# EAGLE board Led_Cup_Top_V3 (EAGLE 9.0.0)
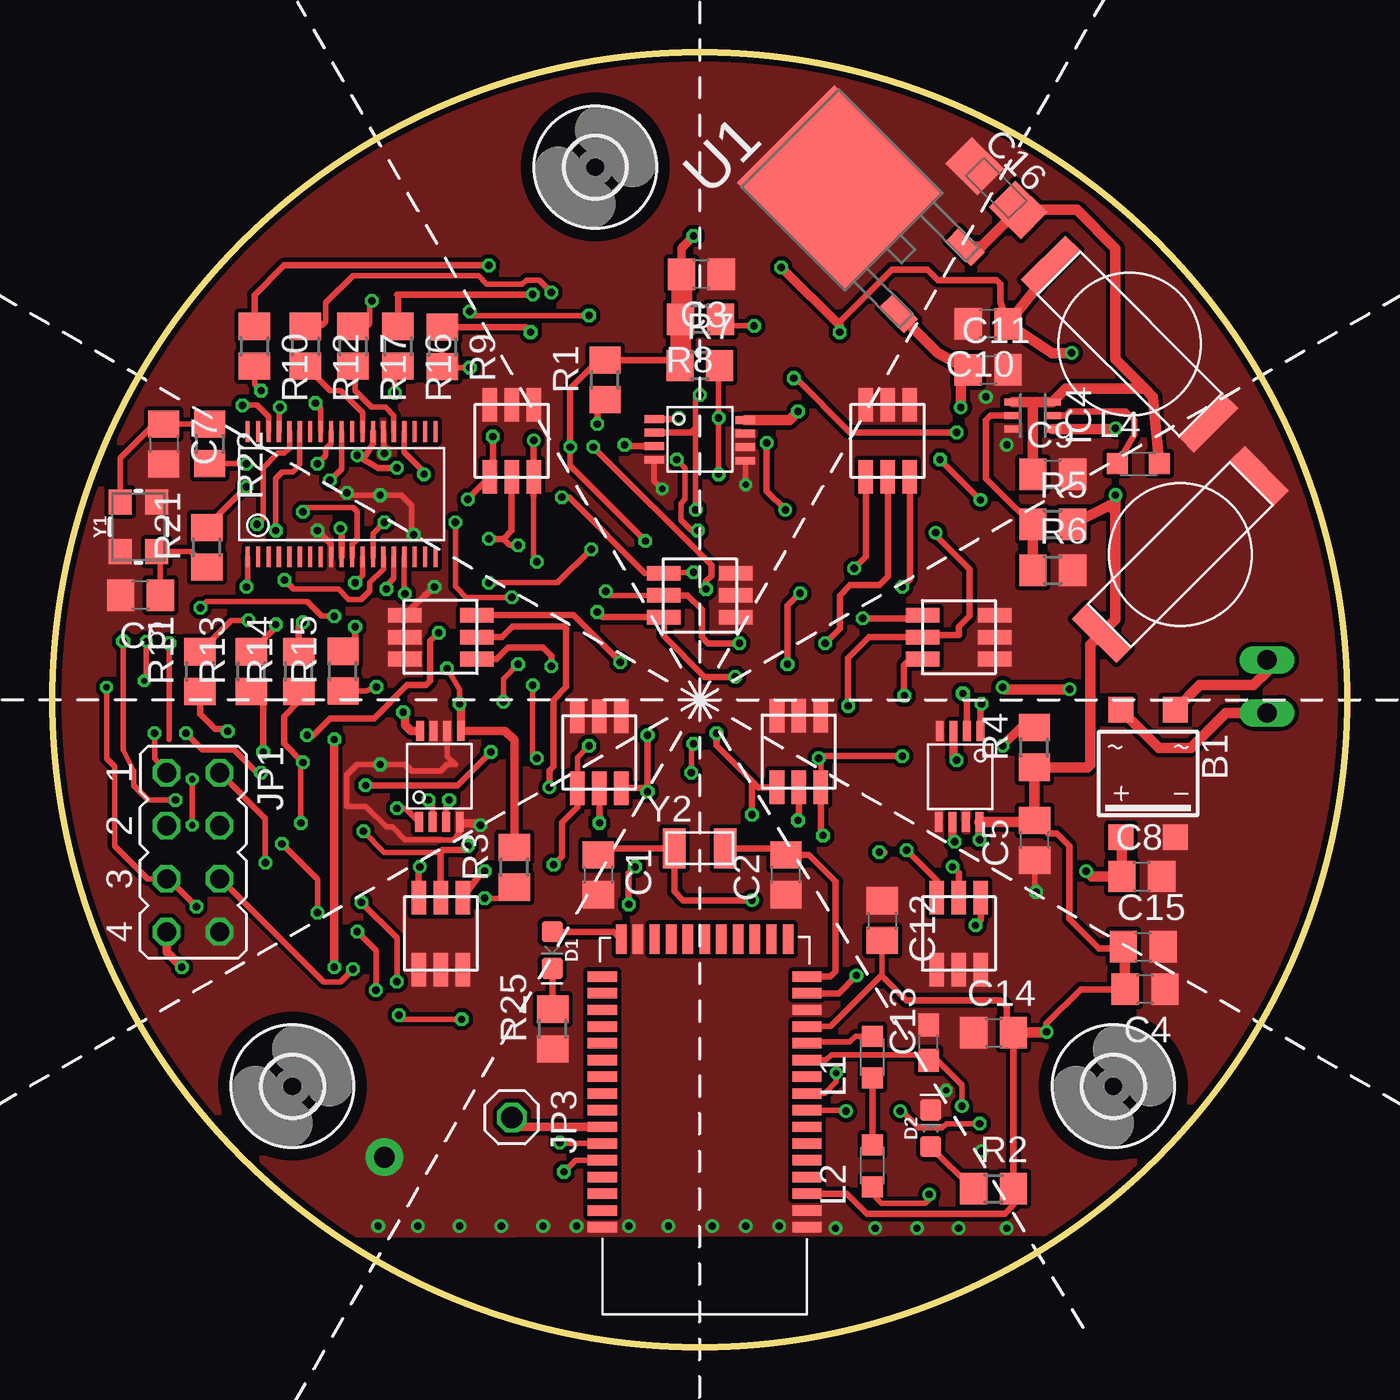
[diagram p0: board, top side]
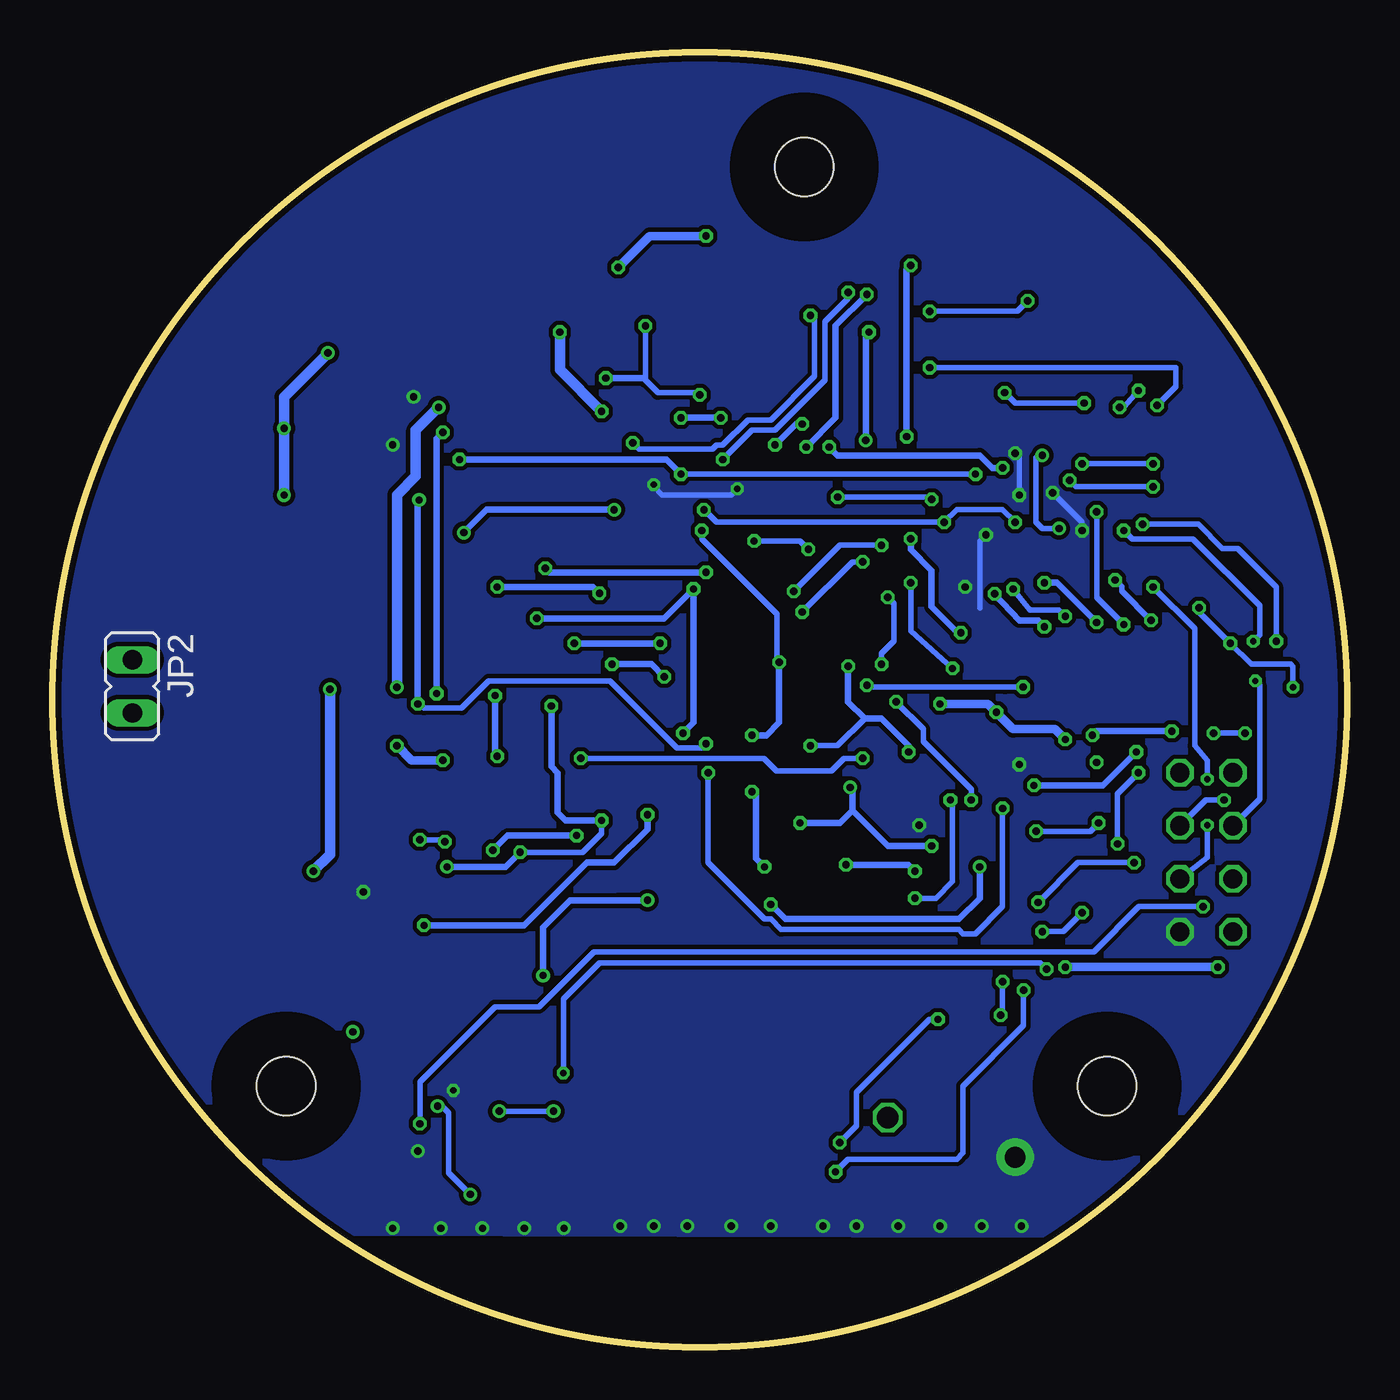
[diagram p1: board, bottom side, seen from below]

Size 62 x 62 mm. Coordinates in mm from the lower left corner, seen from the top.
Outline: circle at 31,31 radius 31
Copper layers (1*16): Top 0.035mm / dielectric 1.5mm / Bottom 0.035mm
Design rules "Bachelorarbeit": minimum track width 0.15mm, minimum drill 0.3mm, track to track 0.205mm, track to pad 0.205mm, pad to pad 0.205mm, via to via 0.205mm, smd to smd 0mil, copper to edge 0.3mm, drill to drill 0.2mm, minimum pad ring 0.2mm, minimum via ring 0.15mm, stop-mask expansion 0.075mm, vias tented up to drill 0mil, thermal gap 0.2mm
Net classes: 0 default: clearance 0.205 mm
tRestrict: area 13.4,-0.8 to 48.8,5.2
bRestrict: area 13.4,-0.9 to 48.8,5.2

## Footprints (pad centres in the part's own frame; a part is rotated, then mirrored left to right if it is on the bottom)
SOIC-4 = smd 1.2 x 1.2: + 1.3,3.05; - -1.3,3.05; ~1 -1.3,-3.05; ~2 1.3,-3.05
C0805 = smd 1.3 x 1.5: 1 -0.95,0; 2 0.95,0
C0603 = smd 1.1 x 1: 1 -0.85,0; 2 0.85,0
A/3216-18W = smd 2.15 x 1.8: + 1.475,0; - -1.475,0
LED-0603 = smd 1 x 1: A -0.877,0; C 0.877,0
LM75MINI = smd 0.95 x 0.38: A0 2.18,0.3; A1 2.18,-0.35; A2 2.18,-1; GND -2.18,-0.95; OS -2.18,-0.3; SCL -2.18,0.35; SDA -2.18,1; VCC 2.18,0.95
SOIC65P210X95-6N = smd 0.35 x 0.8: 1 -0.653,-0.908; 2 -0.003,-0.908; 3 0.647,-0.908; 4 0.647,0.992; 5 -0.003,0.992; 6 -0.653,0.992
JP4Q = drill 0.914 octagon: 1 -3.81,-1.27; 2 -3.81,1.27; 3 -1.27,-1.27; 4 -1.27,1.27; 5 1.27,-1.27; 6 1.27,1.27; 7 3.81,-1.27; 8 3.81,1.27
JP1 = drill 0.914 long: 1 0,-1.27; 2 0,1.27
1X01 = drill 1.016 octagon: 1 0,0
L2012C = smd 1 x 1: 1 -1,0; 2 1,0
R0805 = smd 1.3 x 1.5: 1 -0.95,0; 2 0.95,0
TO228P972X240-3N = smd 0.94 x 1.702: 1 -2.261,-6.096; 3 2.261,-6.096 | smd 6.604 x 7.315: 2 0,0.152
CREEPLCC6 = smd 1.6 x 0.7: B -1.719,1.05; G -1.719,0; GND_B 1.719,1.05; GND_G 1.719,0; GND_R 1.719,-1.05; R -1.719,-1.05
XMC1400_38P = smd 1 x 0.2: P$1 -3,4.5; P$2 -3,4; P$3 -3,3.5; P$4 -3,3; P$5 -3,2.5; P$6 -3,2; P$7 -3,1.5; P$8 -3,1; P$9 -3,0.5; P$10 -3,0; P$11 -3,-0.5; P$12 -3,-1; P$13 -3,-1.5; P$14 -3,-2; P$15 -3,-2.5; P$16 -3,-3; P$17 -3,-3.5; P$18 -3,-4; P$19 -3,-4.5; P$20 3,-4.5; P$21 3,-4; P$22 3,-3.5; P$23 3,-3; P$24 3,-2.5; P$25 3,-2; P$26 3,-1.5; P$27 3,-1; P$28 3,-0.5; P$29 3,0; P$30 3,0.5; P$31 3,1; P$32 3,1.5; P$33 3,2; P$34 3,2.5; P$35 3,3; P$36 3,3.5; P$37 3,4; P$38 3,4.5
GOLDCAP = smd 3 x 1: P$1 0,-5.35; P$2 0,5.35
RBT07 = smd 1.4 x 0.5: 1 -0.649,13.085; 2 -0.649,12.285; 3 -0.649,11.485; 4 -0.649,10.685; 5 -0.649,9.885; 6 -0.649,9.085; 7 -0.649,8.285; 8 -0.649,7.485; 9 -0.649,6.685; 10 -0.649,5.885; 11 -0.649,5.085; 12 -0.649,4.285; 13 -0.649,3.485; 14 -0.649,2.685; 15 -0.649,1.885; 16 -0.649,1.085; 28 9.151,1.085; 29 9.151,1.885; 30 9.151,2.685; 31 9.151,3.485; 32 9.151,4.285; 33 9.151,5.085; 34 9.151,5.885; 35 9.151,6.685; 36 9.151,7.485; 37 9.151,8.285; 38 9.151,9.085; 39 9.151,9.885; 40 9.151,10.685; 41 9.151,11.485; 42 9.151,12.285; 43 9.151,13.085 | smd 0.5 x 1.4: 17 0.251,-0.7; 18 1.051,-0.7; 19 1.851,-0.7; 20 2.651,-0.7; 21 3.451,-0.7; 22 4.251,-0.7; 23 5.051,-0.7; 24 5.851,-0.7; 25 6.651,-0.7; 26 7.451,-0.7; 27 8.251,-0.7
2,8 = hole 2.8: 0,0
CRYSTAL-SMD-3.2X2.5MM = smd 1.2 x 1.1: 1 -1.175,-0.875; 2 1.175,-0.875; 3 1.175,0.875; 4 -1.175,0.875
XTAL320X150X75 = smd 1.092 x 1.905: 1 -1.219,0; 2 1.219,0

## Placement (x,y rotation side)
B1  MB4S  [SOIC-4]  52.46,27.47 180 top
C1  7pF  [C0805]  26.14,22.62 270 top
C2  7pF  [C0805]  35.13,22.62 90 top
C3  100nF  [C0805]  31.07,51.37 180 top
C4  100nF  [C0805]  52.31,17.14 180 top
C5  100nF  [C0805]  47.04,24.27 90 top
C6  4pF  [C0805]  4.23,36.01 180 top
C7  4pF  [C0805]  5.34,43.24 270 top
C8  ?uF  [C0805]  52.16,22.54 0 top
C9  ?uF  [C0805]  47.9,41.8 0 top
C10  ?uF  [C0805]  44.8,49 180 top
C11  0.1uF  [C0805]  44.8,46.8 0 top
C12  0.1uF  [C0805]  39.73,20.43 270 top
C13  1uF  [C0603]  41.96,14.59 90 top
C14  10uF  [C0805]  45.06,15.07 0 top
C15  10uF  [C0805]  52.23,19.18 0 top
C16  [A/3216-18W]  45.2,55.5 315 top
D1  RED  [LED-0603]  23.93,19.02 270 top
D2  BLUE  [LED-0603]  42.06,10.49 90 top
IC1  LM75Mini_TempS N  [LM75MINI]  31,43.44 0 top
IC2  LM75Mini_TempSW  [LM75MINI]  18.56,27.33 90 top
IC3  LM75Mini_TempSE  [LM75MINI]  43.44,27.33 270 top
IC4  TPS61220DCKT  [SOIC65P210X95-6N]  46.9,44.6 270 top
JP1  [JP4Q]  6.74,23.7 270 top
JP2  [JP1]  58.16,31.64 180 bottom
JP3  [1X01]  22,11 270 top
L1  [L2012C]  39.26,13.89 90 top
L2  [L2012C]  39.26,8.69 90 top
L4  [L2012C]  52,42.3 0 top
R1  4.7k  [R0805]  26.46,46.31 90 top
R2  1k  [R0805]  45.06,7.59 0 top
R3  4.7k  [R0805]  22.13,22.98 90 top
R4  4.7k  [R0805]  47.02,28.72 90 top
R5  1M  [R0805]  47.9,39.4 0 top
R6  178k  [R0805]  47.9,37.2 0 top
R7  10k  [R0805]  31,47 0 top
R8  10k  [R0805]  31.04,49.21 180 top
R9  12  [R0805]  18.67,47.89 270 top
R10  12  [R0805]  9.68,47.92 270 top
R11  12  [R0805]  7.08,32.35 90 top
R12  12  [R0805]  12.12,47.92 270 top
R13  12  [R0805]  9.54,32.35 90 top
R14  12  [R0805]  11.81,32.35 90 top
R15  12  [R0805]  13.93,32.38 90 top
R16  12  [R0805]  16.55,47.92 270 top
R17  12  [R0805]  14.39,47.92 270 top
R21  0  [R0805]  7.4,38.3 90 top
R22  510  [R0805]  7.54,43.25 270 top
R25  4.7k  [R0805]  23.96,15.24 90 top
U1  LF33CDT  [TO228P972X240-3N]  37.8,55.4 45 top
U$1  CREEPLCC6  [CREEPLCC6]  31,36 0 top
U$2  CREEPLCC6  [CREEPLCC6]  40,43.4 90 top
U$3  CREEPLCC6  [CREEPLCC6]  22,43.4 90 top
U$4  CREEPLCC6  [CREEPLCC6]  26.19,28.49 90 top
U$5  CREEPLCC6  [CREEPLCC6]  18.6,34 180 top
U$6  CREEPLCC6  [CREEPLCC6]  18.6,19.8 270 top
U$7  CREEPLCC6  [CREEPLCC6]  43.4,34 0 top
U$8  CREEPLCC6  [CREEPLCC6]  35.75,28.52 90 top
U$9  CREEPLCC6  [CREEPLCC6]  43.4,19.8 270 top
U$10  XMC1400_38P  [XMC1400_38P]  13.86,40.84 90 top
U$11  GOLDCAP  [GOLDCAP]  51.58,48.03 45 top
U$12  BLE NANO 2  [RBT07]  35.48,18.84 180 top
U$13  GOLDCAP  [GOLDCAP]  54.01,37.95 135 top
U$15  [2,8]  11.5,12.5 0 top
U$16  [2,8]  50.8,12.5 0 top
U$17  [2,8]  26,56.5 0 top
Y1  CRYSTAL-GROUNDEDSMD-3.2X2.5  [CRYSTAL-SMD-3.2X2.5MM]  4.13,39.28 90 top
Y2  9HT10-32.768KAZF-T  [XTAL320X150X75]  31,23.89 0 top

## Library data of the parts
B1 = rectifier
C1-C16 = rcl; SPICEPREFIX: C
D1 = SparkFun-LED; PROD_ID: DIO-00819
D2 = SparkFun-LED; PROD_ID: DIO-08575
IC1-IC3 U$1-U$11 U$13 = 1_MynewBib
IC4 = TPS61220DCKT; AVAILABILITY: Good; DESCRIPTION: Low Input Voltage, 0.7V Boost Converter with 5.5A Quiescent Current 6-SC70 -40 to 85; MF: Texas Instruments; MP: TPS61220DCKT; PACKAGE: SC-70 Texas Instruments; PRICE: 0.84 USD
JP1 JP2 = jumper
JP3 = pinhead
L1 L2 L4 = rcl; SPICEPREFIX: L
R1-R17 R21 R22 R25 = rcl; SPICEPREFIX: R
U1 = LF33CDT; AVAILABILITY: Unavailable; DESCRIPTION: Voltage stabiliser; LDO, fixed; 3.3V; 1A; TO252AA; SMD; MF: STMicroelectronics; MP: LF33CDT; PACKAGE: TO-252 STMicroelectronics; PRICE: 0.66 USD
U$12 = 1RedBeard
U$15-U$17 = holes
Y1 = SparkFun-Clocks
Y2 = 9HT10-32.768KAZF-T

## Nets
BLAU_N: R10.1 U$1.B U$2.B U$3.B
BLAU_SO: R16.1 U$7.B U$8.B U$9.B
BLAU_SW: R13.1 U$4.B U$5.B U$6.B
GND: B1.- C1.2 C2.1 C3.1 C4.1 C5.1 C6.2 C7.2 C8.2 C9.2 C10.2 C11.2 C12.1 C13.2 C14.1 C15.2 C16.- D2.C IC1.A0 IC1.A1 IC1.A2 IC1.GND IC2.A0 IC2.A1 IC2.GND IC3.A0 IC3.A2 IC3.GND IC4.3 JP1.8 R6.2 R25.1 U1.2 U$1.GND_B U$1.GND_G U$1.GND_R U$2.GND_B U$2.GND_G U$2.GND_R U$3.GND_B U$3.GND_G U$3.GND_R U$4.GND_B U$4.GND_G U$4.GND_R U$5.GND_B U$5.GND_G U$5.GND_R U$6.GND_B U$6.GND_G U$6.GND_R U$7.GND_B U$7.GND_G U$7.GND_R U$8.GND_B U$8.GND_G U$8.GND_R U$9.GND_B U$9.GND_G U$9.GND_R U$10.P$9 U$10.P$25 U$11.P$1 U$12.1 U$12.2 U$12.14 U$12.26 U$12.43 U$13.P$1 Y1.2 Y1.4
GRüN_N: R11.1 U$1.G U$2.G U$3.G
GRüN_SO: R17.1 U$7.G U$8.G U$9.G
GRüN_SW: R14.1 U$4.G U$5.G U$6.G
N$1: IC1.OS R1.1
N$2: IC3.OS R4.2
N$3: IC2.OS R3.1
N$4: C9.1 C16.+ IC4.1 IC4.6 L4.2 U1.3
N$5: IC4.5 L4.1
N$6: IC4.2 R5.1 R6.1
N$28: B1.~2 JP2.2
N$29: C7.1 R22.1 Y1.3
N$30: C6.1 R21.1 Y1.1
N$34: D2.A R2.1
N$35: B1.~1 JP2.1
N$36: L1.2 U$12.12
N$38: L1.1 L2.2
N$39: C13.1 L2.1 U$12.11
N$70: C1.1 U$12.15 Y2.1
N$71: C2.2 U$12.16 Y2.2
N$74: D1.C R25.2
N$75: D1.A U$12.27
P0.10: R21.2 U$10.P$29
P0.11: R22.2 U$10.P$30
P_BLAU_N: R10.2 U$10.P$35
P_BLAU_SO: R16.2 U$10.P$31
P_BLAU_SW: R13.2 U$10.P$11
P_GRüN_N: R11.2 U$10.P$14
P_GRüN_SO: R17.2 U$10.P$24
P_GRüN_SW: R14.2 U$10.P$12
P_ROT_N: R9.2 U$10.P$36
P_ROT_SO: R15.2 U$10.P$16
P_ROT_SW: R12.2 U$10.P$27
RESET: JP3.1 U$12.37
ROT_N: R9.1 U$1.R U$2.R U$3.R
ROT_SO: R15.1 U$7.R U$8.R U$9.R
ROT_SW: R12.1 U$4.R U$5.R U$6.R
SCL: IC1.SCL IC2.SCL IC3.SCL R8.1 U$10.P$13
SCLK: JP1.2 U$12.38
SDA: IC1.SDA IC2.SDA IC3.SDA R7.2 U$10.P$23
SDIO: JP1.1 U$12.39
SWCLK: JP1.4 U$10.P$34
SWD: JP1.3 U$10.P$33
UART_RX: JP1.6 U$10.P$1 U$12.9
UART_TX: JP1.5 U$10.P$15 U$12.8
VCC: C3.2 C4.2 C5.2 C10.1 C12.2 C14.2 C15.1 IC1.VCC IC2.A2 IC2.VCC IC3.A1 IC3.VCC IC4.4 JP1.7 R1.2 R2.2 R3.2 R4.1 R5.2 R7.1 R8.2 U$10.P$10 U$10.P$26 U$11.P$2 U$12.3 U$12.13 U$13.P$2
VCC_DC: B1.+ C8.1 C11.1 U1.1

## Tracks (layer width: path | path; a pad name or v marks a point on that pad's centre or on a via)
BLAU_N  (via drill 0.35)
  Top 0.254: v24.4,40.7 24.73,40.7 28.38,37.05 U$1.B 29.33,37.1 v30.7,37.1
  Top 0.305: v20.9,51.8 11.1,51.8 9.68,50.38 R10.1 | v38.4,37.3 38.95,37.85 U$2.B | v19.9,40.6 19.9,40.63 U$3.B 21.1,41.83 v21.1,43.6
  Bottom 0.254: v24.4,40.7 20,40.7 v19.9,40.6
  Bottom 0.305: v21.1,43.6 21.1,51.6 v20.9,51.8 | v38.4,37.3 38.2,37.1 v30.7,37.1
BLAU_SO  (via drill 0.35)
  Top 0.305: R16.1 16.55,50.34 16.5,50.4 v23,50.4 | v38.8,34.9 41.53,34.9 U$7.B | v31.8,29.4 31.8,28.8 33.5,27.1 | v44.2,20.2 44.45,20.45 U$9.B | v31.3,36.3 31.3,36.68 31.55,36.93 31.55,37.45 v25.9,43.1 | 33.5,27.1 v33.5,25.5 | U$8.B 33.8,26.8 33.5,27.1
  Bottom 0.305: v23,50.4 24.5,48.9 24.5,44.5 v25.9,43.1 | v38.8,34.9 32.7,34.9 v31.3,36.3 31.3,29.9 v31.8,29.4 | v44.2,20.2 39.4,20.2 36.4,23.2 35.1,23.2 33.5,24.8 v33.5,25.5
BLAU_SW  (via drill 0.35)
  Top 0.254: U$4.B 25.14,28.24 v25.7,28.8
  Top 0.305: R13.1 10.1,30.84 v10.1,28.5 | v15,26.9 19.4,26.9 v21,28.5 | U$6.B 20.32,22.42 v20.7,22.8 | v24,23.1 24.4,23.5 24.4,25.12 25.14,25.87 U$4.B | U$5.B 21.27,32.95 21.82,33.5 23.5,33.5 23.9,33.1 v23.9,32.6
  Bottom 0.254: v25.7,28.8 24.4,28.8 23.1,30.1
  Bottom 0.305: v23.9,32.6 23.9,30.9 23.1,30.1 22.3,30.1 21,28.8 v21,28.5 | v10.1,28.5 11.7,26.9 v15,26.9 | v20.7,22.8 21,23.1 v24,23.1
GND  (via drill 0.3, 0.35, 1)
  Top 0.254: U$10.P$9 13.36,38.45 v12.7,39.1 | U$10.P$25 15.86,43.05 v15.9,42.8 | IC2.GND 20.35,25.15 v20.5,25 19.66,25 IC2.GND | C5.1 47.04,21.86 v47.1,21.8 | IC2.A1 18.91,28.29 19.3,27.9 18.9,27.9 18.6,27.6 17.2,27.6 16.9,27.9 v15.7,27.9 14.6,27.9 14.1,27.4 14.1,25.9 15,25.9 16,24.9 16.3,24.9 16.9,24.3 19.2,24.3 19.51,24.61 IC2.GND | v14.1,40.9 14.2,40.8 v15.7,40.8 16.7,40.8 17.2,40.3 17.2,39 v17.3,38.9 | IC1.GND 28.82,41.48 v29.2,41.1 | v33.2,41.3 33.2,42.42 IC1.A2
  Top 0.305: v18.3,36.4 17.8,35.97 U$5.GND_R
  Bottom 0.254: v15.9,42.8 15.7,42.6 v15.7,40.8 | v14.1,40.9 12.7,39.5 v12.7,39.1 | v17.3,38.9 17.6,38.6 17.6,35.4 | v29.2,41.1 29.5,40.8 32.8,40.8 33.2,41.2 v33.2,41.3
  other vias: 15.6,5.8 17.5,5.8 19.5,5.8 21.5,5.8 23.5,5.8 25.1,5.8 27.6,5.8 29.5,5.8 31.6,5.8 34.8,5.8 33.2,5.8 37.5,5.7 39.4,5.7 41.4,5.7 43.4,5.7 45.7,5.7 42.8,12.3 15.9,9.1 45.7,43.2 44.7,45.5 44.5,9.4
  pour Top (no thermals): -7.23,0.44 -7.23,69 66.94,69 67.9,68.05 68.85,-5.2 67.58,-5.47 -6.32,-5.47
  pour Bottom (no thermals): -10.81,-7.1 -10.81,65.91 -10.55,72.23 69.9,72.23 70.44,69.32 71.48,-6.15 69.58,-8.05 -9.86,-8.05
GRüN_N  (via drill 0.35)
  Top 0.254: v26.5,36.2 26.7,36 U$1.G | v22.3,38.4 21.9,38.4 21.6,38.7
  Top 0.305: R11.1 7.08,30.32 7.8,29.6 8.3,29.6 v8.4,29.5 | v12.2,29.3 12.5,29.3 13.3,30.1 15.4,30.1 17,31.7 17.9,31.7 18.1,31.9 18.1,33.8 v18.5,34.2 | v20.9,38.7 21.6,38.7 22,39.1 U$3.G | v37,33.7 37.7,34.4 37.7,36 38.2,36.5 39.6,36.5 40,36.9 U$2.G | v32.9,33.7 31.4,33.7 31.1,34 31.1,35.32 30.42,36 U$1.G
  Bottom 0.254: v26.5,36.2 24.3,38.4 v22.3,38.4
  Bottom 0.305: v8.4,29.5 12,29.5 v12.2,29.3 | v32.9,33.7 v37,33.7 | v20.9,38.7 20.9,38.19 19.9,37.19 19.9,35.45 18.65,34.2 v18.5,34.2
GRüN_SO  (via drill 0.35)
  Top 0.254: v25.7,49.4 20.2,49.4 v20,49.6 | v15.3,50.1 15.2,50 15.2,49 15.1,48.9 14.4,48.9 R17.1 | 41.79,34 40.78,34 | U$9.G 43.4,21.99
  Top 0.305: v38.1,30.7 38.1,33 39.1,34 40.78,34 U$7.G | 35.7,27.4 35.75,27.35 U$8.G 35.75,25.27 v35.7,25.22 | 43.4,21.99 43.4,22.7 v43.1,23 | v34.2,43.3 34.2,41 v35.1,40.1 | v42.3,39 42.3,38.86 43.9,37.26 43.9,35 43.4,34.5 43.4,34.1 41.89,34.1 41.79,34
  Top 0.406: 39.8,23.7 v39.6,23.7
  Bottom 0.254: v35.7,25.22 35.7,24.6 36.6,23.7 v39.6,23.7 | v34.2,43.3 33.9,43 30.4,43 30.2,43.2 29.9,43.2 28.7,44.4 27.6,44.4 25.5,46.5 25.5,49.3 v25.7,49.4 | v20,49.6 15.8,49.6 v15.3,50.1
  Bottom 0.305: v38.1,30.7 38.1,27.8 37.8,27.5 37.8,25.6 37.42,25.22 v35.7,25.22 | v43.1,23 40.3,23 v39.6,23.7 | v35.1,40.1 41.2,40.1 v42.3,39
GRüN_SW  (via drill 0.35)
  Top 0.254: 18.6,23.7 15.9,23.7 v14.9,24.7 | v11.9,25.1 11.9,27.9 v12,28
  Top 0.305: 21.54,34 21.22,34 | R14.1 11.81,30.91 11.1,30.2 11.1,28.9 v12,28 | v19.9,24 19.7,23.8 18.7,23.8 18.6,23.7 U$6.G | v23.8,26.8 23.8,27.6 24,27.8 24,31 24.6,31.6 24.6,34.4 24.5,34.5 22.04,34.5 21.54,34 | U$4.G v26.19,25.11 v26.2,25.1 | U$5.G 21.54,34
  Bottom 0.254: v14.9,24.7 12.3,24.7 v11.9,25.1
  Bottom 0.305: 23.7,25.7 23.7,26.7 v23.8,26.8 | 21.4,24 v19.9,24 22,24 23.7,25.7 | v26.2,25.1 24.3,25.1 23.7,25.7
N$1  (via drill 0.35)
  Top 0.305: IC1.OS 27.46,43.14 v27.4,43.2 | v26.1,44.2 26.1,45 R1.1
  Bottom 0.305: v27.4,43.2 26.4,44.2 v26.1,44.2
N$2  (via drill 0.35)
  Top 0.406: IC3.OS 43.14,28.26 v43.3,28.1 | v45.5,28.8 46.37,29.67 R4.2
  Bottom 0.406: v43.3,28.1 44.8,28.1 v45.5,28.8
N$3  (via drill 0.35)
  Top 0.254: IC2.OS 18.86,26.06 v19,26.2 | R3.1 21.6,21.5 v20.7,21.5
  Bottom 0.254: v20.7,21.5 19.7,21.5 18.9,22.3 18.9,26.1 v19,26.2
N$4
  Top 0.508: C9.1 46.95,45.15 | IC4.1 46.85,45.25 46.95,45.15 | 46.95,45.15 47.05,45.25 IC4.6 48.54,45.9 52.3,45.9 | L4.2 52.7,45.5 52.3,45.9 | U1.3 44.47,52.69 C16.+ 49.04,54.46 50.9,52.6 50.9,47.3 52.3,45.9
N$5
  Top 0.305: L4.1 51.8,43.7 51.8,44.4 51.4,44.8 48.7,44.8 48.5,44.6 IC4.5
N$6
  Top 0.305: IC4.2 44.9,44.6 44.7,44.4 44.7,41.6 46,40.3 R5.1
  Top 0.508: R6.1 R5.1
N$28
  Top 0.508: JP2.2 56.17,30.37 54.5,28.7 52.98,28.7 B1.~2 51.4,30.28
N$29
  Top 0.254: Y1.3 3.25,42.57 4.88,44.19 C7.1 7.53,44.19 R22.1
N$30
  Top 0.254: C6.1 5.18,37.91 5.16,37.93 Y1.1 6.64,38.11 R21.1
N$34
  Top 0.305: R2.1 42.06,9.54 D2.A
N$35
  Top 0.508: B1.~1 54.94,31.7 57.5,31.7 58.16,32.36 JP2.1
N$36
  Top 0.254: L1.2 38.45,14.89 38.17,14.61 36.2,14.61 U$12.12
N$38
  Top 0.305: L1.1 L2.2
N$39  (via drill 0.35)
  Top 0.254: U$12.11 37.05,13.75 37.3,14 41.6,14 C13.1 42.37,13.74 43.55,12.56 v43.55,11.54 | L2.1 39.26,7.34 39.7,6.9 41.77,6.9 42.06,7.19
  Top 0.305: 42.06,7.19 v41.99,7.32
  Bottom 0.254: v43.55,11.54 43.34,11.54 43.02,11.22 43.02,8.35 v41.99,7.32
N$70  (via drill 0.35)
  Top 0.305: C1.1 26.46,23.89 Y2.1 29.78,21.82 30.2,21.4 v33.5,21.4 | v38.5,17.8 37.65,16.95 U$12.15
  Bottom 0.305: 34.9,21.4 v33.5,21.4 37.2,21.4 38.5,20.1 v38.5,17.8
N$71
  Top 0.254: C2.2 36.23,23.57 37.5,22.3
  Top 0.305: U$12.16 37.25,17.75 37.5,18 37.5,22.3 | 36.2,23.57 C2.2 34.81,23.89 Y2.2
N$74
  Top 0.305: D1.C 23.96,18.11 R25.2
N$75
  Top 0.305: D1.A 26.88,19.89 U$12.27
P0.10  (via drill 0.35)
  Top 0.254: U$10.P$29 13.86,42.05 v13.3,41.5 | v9.3,41.2 7.4,39.3 R21.2
  Bottom 0.254: v13.3,41.5 13,41.2 v9.3,41.2
P0.11  (via drill 0.35)
  Top 0.254: R22.2 v9.3,42.3 | v12.7,42.3 13.1,42.7 13.1,43 13.36,43.26 U$10.P$30
  Bottom 0.254: v9.3,42.3 v12.7,42.3
P_BLAU_N  (via drill 0.35)
  Top 0.254: R10.2 9.68,46.12 v10,45.8 | U$10.P$35 10.86,44.95 v10.9,45
  Bottom 0.254: v10,45.8 10.7,45 v10.9,45
P_BLAU_SO  (via drill 0.35)
  Top 0.254: R16.2 16.4,46.82 v16.4,45.7 | v12.6,45.2 12.86,44.95 U$10.P$31
  Bottom 0.254: v16.4,45.7 15.9,45.2 v12.6,45.2
P_BLAU_SW  (via drill 0.35)
  Top 0.254: R13.2 10.7,34.46 v10.7,34.6 | v12,40 12.2,40.2 14.4,40.2 14.6,40 14.6,38.7 14.36,38.45 U$10.P$11
  Bottom 0.254: v10.7,34.6 12,35.9 v12,40
P_GRüN_N  (via drill 0.35)
  Top 0.254: R11.2 8.58,34.8 v9.4,34.8 | U$10.P$14 15.86,37.26 15.2,36.6 15.2,36.2 14.8,35.8 14.2,35.8 13.7,36.3 11.55,36.3 v11.12,36.73
  Bottom 0.254: v9.4,34.8 10.8,36.2 10.8,36.41 v11.12,36.73
P_GRüN_SO
  Top 0.254: R17.2 14.5,46.87 14.5,45.8 15.3,45 15.96,45 16.36,44.6 U$10.P$24
P_GRüN_SW  (via drill 0.35)
  Top 0.254: v14.5,36.6 14.86,36.95 U$10.P$12
  Top 0.305: R14.2 11.81,34.51 v12,34.7
  Bottom 0.305: v12,34.7 13.9,36.6 v14.5,36.6
P_ROT_N  (via drill 0.35)
  Top 0.254: U$10.P$36 10.36,44.55 9.8,45.1 v9.1,45.1 | 18.67,47.63 R9.2 18.7,46.9 v20,46.9
  Bottom 0.254: v9.1,45.1 8.2,46 8.2,46.9 v20,46.9
P_ROT_SO  (via drill 0.35)
  Top 0.254: v16.89,36.07 16.86,36.1 U$10.P$16
  Top 0.305: R15.2 14.5,33.9 v14.5,34.5
  Bottom 0.305: v14.5,34.5 14.8,34.8 15.7,34.8 v16.89,36.07
P_ROT_SW
  Top 0.254: R12.2 13.3,45.8 13.8,45.8 14.86,44.74 U$10.P$27
RESET
  Top 0.305: 22.7,10.55 22.45,10.55
  Top 0.406: JP3.1 22.45,10.55 22.7,10.55 22.9,10.55 U$12.37
ROT_N  (via drill 0.35)
  Top 0.254: 26.35,34.95 28.38,34.95 | v23.2,37.6 23.05,37.75 23.05,40.78
  Top 0.305: 23.05,40.78 U$3.R v23.05,43.42 | v22.9,48.6 22.66,48.84 R9.1 | v40.7,36.4 41.05,36.75 U$2.R | v35.8,36.1 35.2,35.5 v35.2,32.7 | v32.7,32.1 31.23,32.1 29.28,34.05 U$1.R 26.35,34.95 v26.1,35.2
  Bottom 0.254: v26.1,35.2 23.7,37.6 v23.2,37.6
  Bottom 0.305: v22.9,48.6 23.05,48.45 v23.05,43.42 | v40.7,36.4 36.1,36.4 v35.8,36.1 | v35.2,32.7 33.3,32.7 v32.7,32.1
ROT_SO  (via drill 0.35)
  Top 0.254: v23,31.7 23,28.4 v23.2,28.2 | v36.7,28.2 36.8,28.1 36.8,26.99 36.8,26.86 | v40.9,23.8 42.28,22.42 | R15.1 15,31.43 v15.52,31.61
  Top 0.305: v40.8,31.2 40.78,31.22 40.78,32.67 41.06,32.95 U$7.R | v40.7,28.3 36.8,28.3 v36.7,28.2 | 36.8,26.86 U$8.R 36.8,24.6 v36.9,24.5 | U$9.R 42.35,22.35 v40.9,23.8 | 36.9,26.88 36.8,26.99
  Bottom 0.254: v36.7,28.2 27.93,28.2 27.34,27.6 24.7,27.6 24.1,28.2 v23.2,28.2 | v15.52,31.61 16.39,31.6 22.9,31.6 v23,31.7
  Bottom 0.305: v40.8,31.2 40.8,28.4 v40.7,28.3 | v40.9,23.8 40.2,24.5 v36.9,24.5
ROT_SW  (via drill 0.35)
  Top 0.254: v23.9,50.5 23.3,51.1 22.7,51.1 22.5,50.9 20.8,50.9 20.4,51.3 14.4,51.3 13.1,50 13.1,49.1 12.9,48.9 12.2,48.9 R12.1 | v29.9,42.5 30.3,42.1 30.3,40.6 30.1,40.4 30.1,39.6 30.6,39.1 v30.9,39.1
  Top 0.305: v27.2,32.8 24.95,35.05 U$5.R | v27.6,21.2 27.6,22.7 v27.9,23 | U$6.R 17.55,23.05 v17.6,23 | U$4.R 28.33,26.77 v28.5,26.6 v28.5,29.3
  Bottom 0.254: v23.9,50.5 23.9,50.2 25,49.1 25,46.3 27.4,43.9 28.5,43.9 v29.9,42.5 | v30.9,39.1 30.9,38.7 27.3,35.1 27.3,32.9 v27.2,32.8
  Bottom 0.305: v27.2,32.8 27.2,29.9 27.8,29.3 v28.5,29.3 | v27.6,21.2 26.9,20.5 18.6,20.5 17.6,21.5 v17.6,23 | v27.9,23 28.3,23.4 28.3,26.4 v28.5,26.6
SCL  (via drill 0.35)
  Top 0.254: U$10.P$13 15.36,38.95 v15.9,39.5 | v30.8,40.1 30.8,44 30.8,45.4 v31,45.6 | v33.6,48.9 32.3,48.9 R8.1 | IC2.SCL 18.21,25.99 v18,26.2 | v19.3,39.5 19.3,36.42 19.82,35.9 v22,35.9 | v22.3,32.7 21.6,32 v21.6,30.9
  Top 0.305: IC1.SCL 29.69,43.79 | 29.69,43.79 29.7,43.8 | 29.69,43.79 30.59,43.79 30.8,44 | IC3.SCL 43.79,31.11 v43.6,31.3 | v43.3,43.8 38.2,43.8 35.6,46.4 v35.5,46.4
  Bottom 0.254: v30.8,40.1 30.2,39.5 v19.3,39.5 18.7,40.1 16.5,40.1 v15.9,39.5 | v31,45.6 31.1,45.7 33,45.7 33.6,46.3 v33.6,48.9 | v18,26.2 18,26.7 20.3,29 20.3,29.6 v21.6,30.9 | v22,35.9 21.7,35.6 21.7,33.8 22.3,33.2 v22.3,32.7
  Bottom 0.305: v43.6,31.3 43.6,43.5 v43.3,43.8 | v35.5,46.4 33.7,46.4 33.6,46.3
SCLK  (via drill 0.35)
  Top 0.254: U$12.38 24.35,9.75 v24.3,9.8 | v19.6,15.7 16.8,15.7 v16.6,15.9 | v16.5,17.5 16.5,19.6 v14.8,21.3 | v10.2,23.2 10.2,25.32 JP1.2
  Bottom 0.254: v24.3,9.8 23.5,10.6 23.5,12.2 20,15.7 v19.6,15.7 | v16.6,15.9 16.5,16 v16.5,17.5 | v14.8,21.3 12.9,23.2 v10.2,23.2
SDA  (via drill 0.35)
  Top 0.254: U$10.P$23 16.86,42.84 17.8,41.9 v17.8,41.8 | v31.9,41.8 v31.9,44.5 31.9,46.95 R7.2 | IC2.SDA 16.91,25.8 v16.5,25.8 | v30.7,28.9 30.6,28.8 v30.6,27.5 | v44.5,30.8 44.44,30.8
  Top 0.305: IC1.SDA 29.94,44.44 v30,44.5 | IC3.SDA 44.44,30.8 | v44.44,40.56 v42.5,42.5
  Bottom 0.254: v17.8,41.8 v31.9,41.8 | v44.5,30.8 44.4,30.8 44.2,30.6 42.4,30.6 41.1,31.9 35.3,31.9 32.1,28.7 30.9,28.7 v30.7,28.9 | v30.6,27.5 30.6,23.2 27.9,20.5 27.6,20.5 27.1,20 18.6,20 18.4,19.8 17.8,19.8 16.5,21.1 v16.5,25.8
  Bottom 0.305: v30,44.5 v31.9,44.5 | v42.5,42.5 32.6,42.5 v31.9,41.8 | v44.5,30.8 44.5,40.5 v44.44,40.56
SDIO  (via drill 0.35)
  Top 0.254: JP1.1 4.9,28.18 v4.9,29.4 | v6.4,29.4 7.2,28.6 8.7,28.6 9.8,27.5 v10,27.5 | v11,24.1 12.7,22.4 v12.7,20.8 | v14.6,19.9 15.5,19 v15.5,17.1 | 26.29,9 U$12.39 25.05,8.95 v24.5,8.4
  Bottom 0.254: v4.9,29.4 v6.4,29.4 | v10,27.5 11,26.5 v11,24.1 | v12.7,20.8 13.6,19.9 v14.6,19.9 | v15.5,17.1 15.5,15.4 18.4,12.5 18.4,9.3 18.7,9 23.9,9 v24.5,8.4
SWCLK  (via drill 0.35)
  Top 0.254: v9.8,39.4 10.1,39.7 10.1,42.1 10.8,42.8 11.1,42.8 11.36,43.05 U$10.P$34 | v3.4,33.8 3.4,28.6 3.9,27.6 3.9,26.9 4.6,26.2 v5.9,26.2
  Bottom 0.254: v5.9,26.2 6.78,26.2 JP1.4 | v9.8,39.4 7.14,39.4 5.97,38.24 5.24,38.24 3.4,36.4 v3.4,33.8
SWD  (via drill 0.3, 0.35)
  Top 0.254: v10.7,39.1 10.7,41.6 11,41.9 11.5,41.9 11.86,42.26 U$10.P$33 | v4.5,33.8 4.5,32 v4.4,31.9
  Bottom 0.254: v10.7,39.1 10.3,38.7 7.4,38.7 4.2,35.5 4.2,34.1 v4.5,33.8 | JP1.3 4.2,26.24 4.2,31.7 v4.4,31.9
UART_RX  (via drill 0.3, 0.35)
  Top 0.254: U$10.P$1 9.36,36.45 v9.3,36.4 9.2,36.3 | v14.4,18.1 13.8,17.5 13,17.5 8.1,22.4 JP1.6 | v6.7,25 v6.7,27.2 | U$12.9 36.98,12.15 37.53,12.7 v37.53,13.13
  Bottom 0.254: v9.3,36.4 7.3,34.4 7.3,28.8 6.7,28.1 v6.7,27.2 | JP1.6 6.7,23.44 v6.7,25 | v14.4,18.1 14.7,18.4 35.8,18.4 37.53,16.67 v37.53,13.13
UART_TX  (via drill 0.3, 0.35)
  Top 0.254: U$10.P$15 16.36,36.81 16,36.46 v16,36.3 | v13.5,35 12.9,35 12.2,35.7 7.4,35.7 v7.1,35.4 | 5.6,29.1 v5.6,33.7 | v44.4,10.7 42.8,10.7 42.6,10.5 41.5,10.5 40.7,11.3 v40.6,11.3 | v2.6,31.6 2.6,28.2 3,27.8 3,24 4.57,22.43 JP1.5 5.57,22.43 v6.9,21.1 | U$12.8 37.95,11.35 v38,11.3
  Bottom 0.254: v16,36.3 15.2,35.3 13.8,35.3 v13.5,35 | v7.1,35.4 7.1,35.2 v5.6,33.7 4.6,32.7 2.7,32.7 2.6,32.6 v2.6,31.6 | v44.4,10.7 44.4,12.7 40.8,16.3 38.7,16.3 36.06,18.94 12.14,18.94 9.97,21.1 v6.9,21.1 | v38,11.3 v40.6,11.3
VCC  (via drill 0.35)
  Top 0.254: 44.39,24.6 44.4,24.59 v44.4,24.3 | v19.5,30.8 19.5,31.5 v18.9,32.5 | v20.9,36.6 24.2,36.6 v25.8,38.2 | v28.4,38.6 24.8,42.2 v24.8,43.1 | 24.8,45.9 26.16,47.27 R1.2 | C12.2 39.73,17.83 39.7,17.8 37.25,15.35 U$12.13
  Top 0.305: U$10.P$10 13.86,39.14 v13.8,39.2 | U$10.P$26 15.36,43.26 15,42.7 v14.6,42.7 15.6,42.1 v16.5,42.1 | 24.8,45.9 v24.8,43.1 | R1.2 29.79,47.27 R7.1 30.09,47.03 30.09,48.9 | 30.09,48.9 R8.2 | C3.2 30.12,48.94 30.09,48.9 | U$12.3 38.05,7.35 39,6.4 45.6,6.4 46.02,6.82 46.02,7.5 46.01,7.51 R2.2 C14.2 45.7,15.38 45.7,16.3 45.4,16.6 40.9,16.6 39.7,17.8 | C4.2 49.24,17.14 47.6,15.5 v47.6,15.1 | 51.36,19.1 50.1,19.1 48.7,20.5 48.7,24 48.1,24.6 47.66,24.6 C5.2 | C10.1 45.4,50.05 45.4,50.9 45.2,51.1 42.4,51.1 41.9,51.6 40.2,51.6 37.7,49.1 37.7,48.9
  Top 0.406: R3.2 22.13,29.07 21.69,29.51 IC2.A2 19.56,30.64 19.4,30.8 v19.5,30.8 | v16.8,30.4 16.9,30.3 16.9,29.8 17.19,29.51 IC2.VCC | JP1.7 5.47,18.93 v6.2,18.2 | v13.5,18.2 v13.5,29.1 | IC3.A1 43.09,24.31 v43.2,24.2 | 44.3,24.2 v44.4,24.3 44.39,24.31 44.39,24.6 IC3.VCC | C3.2 30.12,52.62 v30.7,53.2 | v34.9,51.7 37.7,48.9 v37.7,48.6
  Top 0.508: C4.2 51.36,19.1 51.36,19.6 C15.1 | IC3.VCC 46.97,25.15 C5.2 47.02,25.24 R4.1 49.57,27.77 49.7,27.9 49.7,33.64 U$13.P$2 50.9,34.84 50.9,40 | C14.2 47.57,15.07 v47.6,15.1 | IC1.VCC 35.29,44.39 v35.7,44.8 | v50.9,44 50.85,43.95 IC4.4 | U$11.P$2 47.8,51.55 C10.1 47.85,47.6 v48.8,47.6 | v50.9,40.8 50.9,40 | R5.2 50.6,40.3 50.9,40
  Top 1.016: C3.2 30.12,49.25 R8.2 30.09,47.03
  Bottom 0.254: v14.6,42.7 14.9,42.6 14.9,39.5 14.6,39.2 v13.8,39.2 | v43.2,24.2 43.3,24.3 v44.4,24.3 | v18.9,32.5 20.9,34.3 v20.9,36.6 | v25.8,38.2 26.2,38.6 v28.4,38.6
  Bottom 0.305: v24.8,43.1 24.4,42.7 17.6,42.7 17,42.1 v16.5,42.1
  Bottom 0.406: v19.5,30.8 17.2,30.8 v16.8,30.4 16,29.6 14,29.6 v13.5,29.1 | v6.2,18.2 v13.5,18.2 | v30.7,53.2 33.4,53.2 v34.9,51.7
  Bottom 0.508: v35.7,44.8 37.7,46.8 v37.7,48.6 | v50.9,40.8 v50.9,44 50.9,45.5 v48.8,47.6
VCC_DC  (via drill 0.35)
  Top 0.508: B1.+ 51.21,24.37 C8.1 49.76,22.54 v49.5,22.8 | 43.85,46.95 C11.1 | v48.7,31.5 45.6,31.5 v45.5,31.6 | v43.5,45 43.5,47.25 C11.1 | C11.1 42.4,47.6 U1.1
  Bottom 0.508: v49.5,22.8 48.7,23.6 v48.7,31.5 | v45.5,31.6 45.5,40.8 44.6,41.7 44.6,43.9 v43.5,45

## Text on the board
tStop: Tobias Heigl | LED_CUP_Top_V3 | 1 | 1 | VCC TX SWD SDIO / GND RX SWCLK SCLK | VCC TX SWD SDIO / GND RX SWCLK SCLK
tCream: Tobias Heigl | LED_CUP_Top_V2